# Altium PCB PCB.PcbDoc
Units mm, origin at the board's own origin, x right, y up, seen from the top; angles counter-clockwise.
Board outline 48.26 x 53.21 mm, 4 copper layers (Top Layer, GND, PWR, Bottom Layer), stack 1.586 mm thick; 30 components, 51 nets, 200 pads, 89 vias.
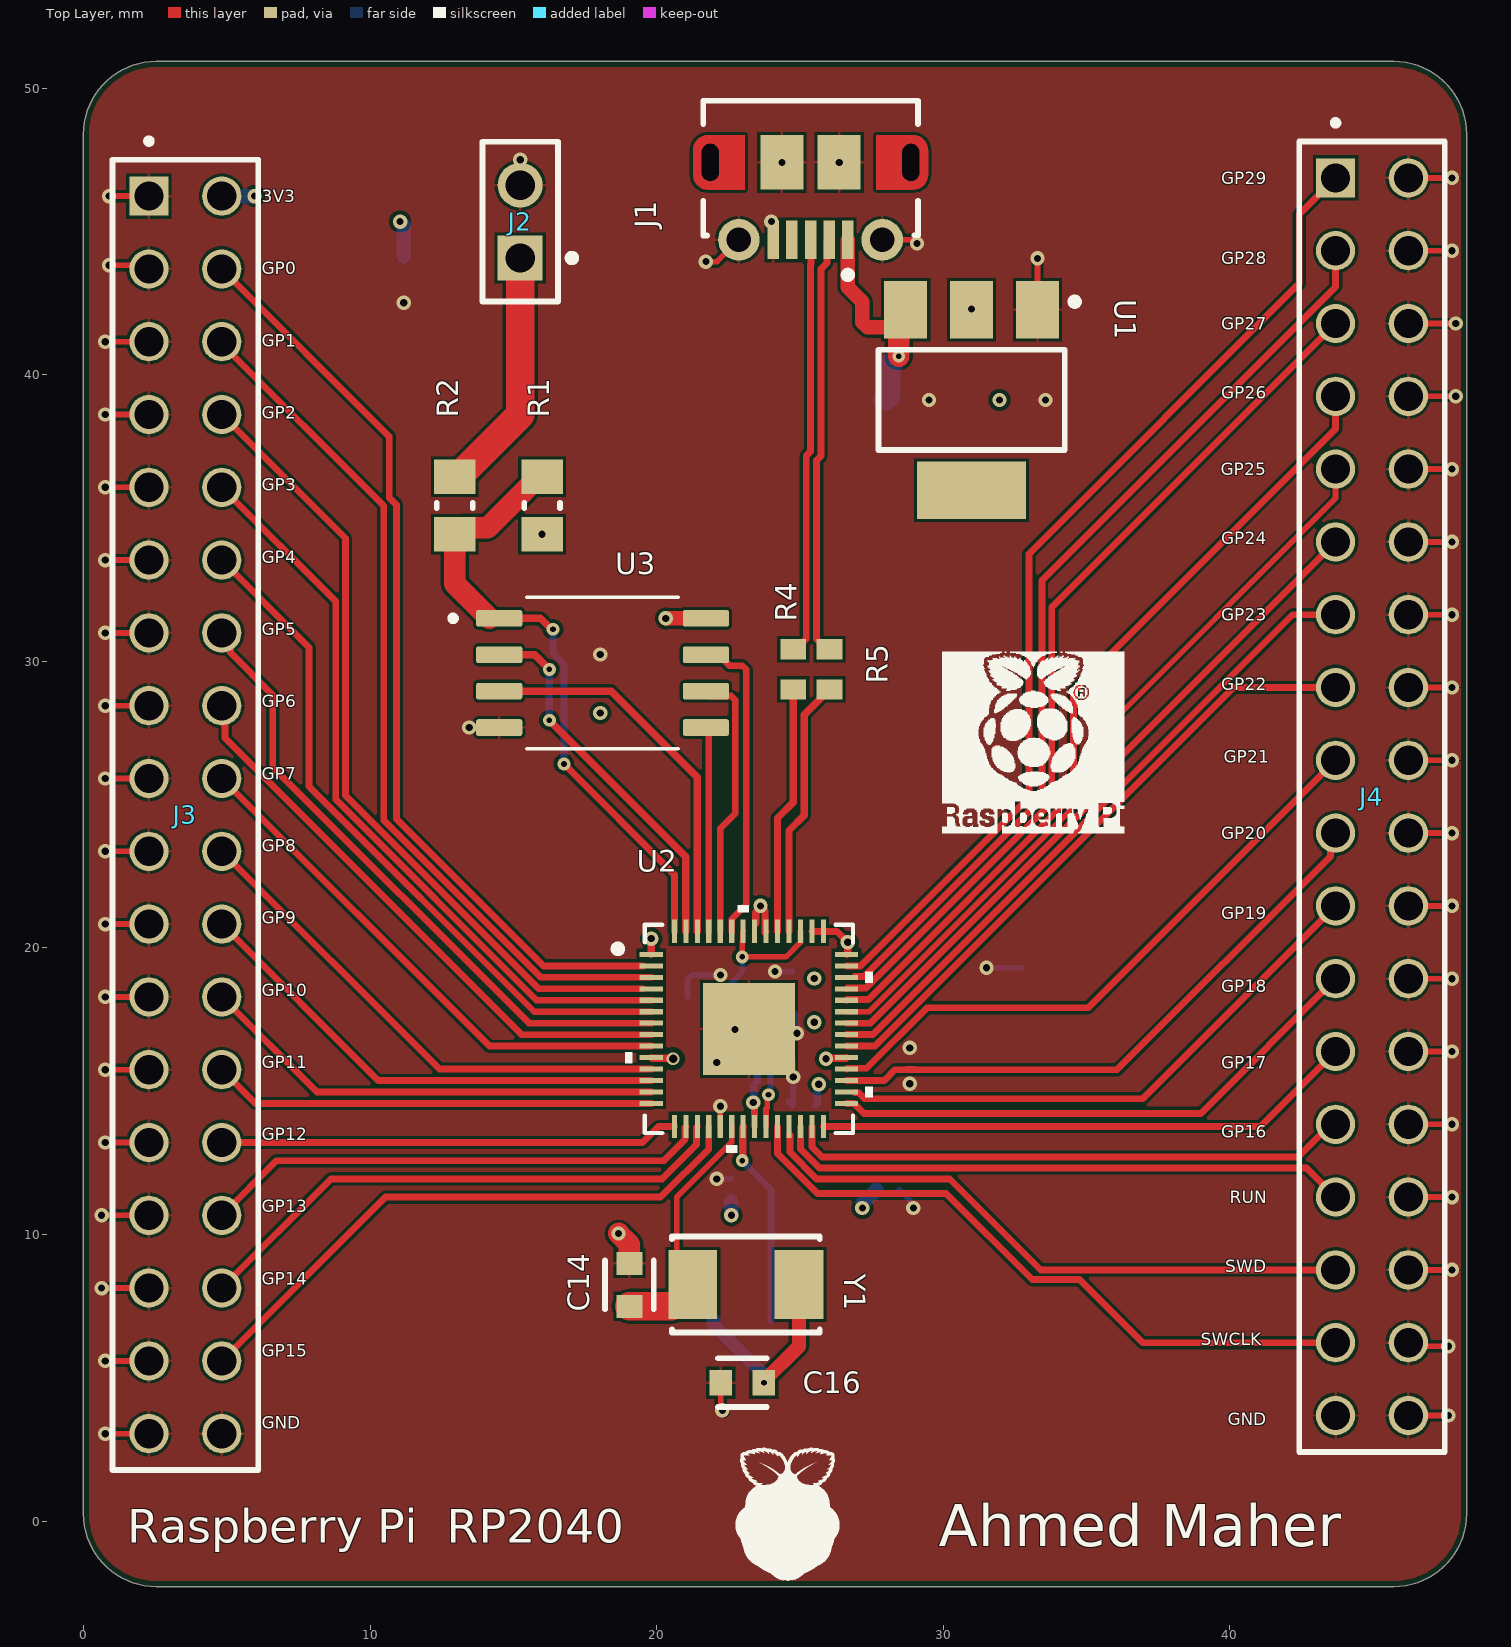
[diagram p0: Top Layer view]
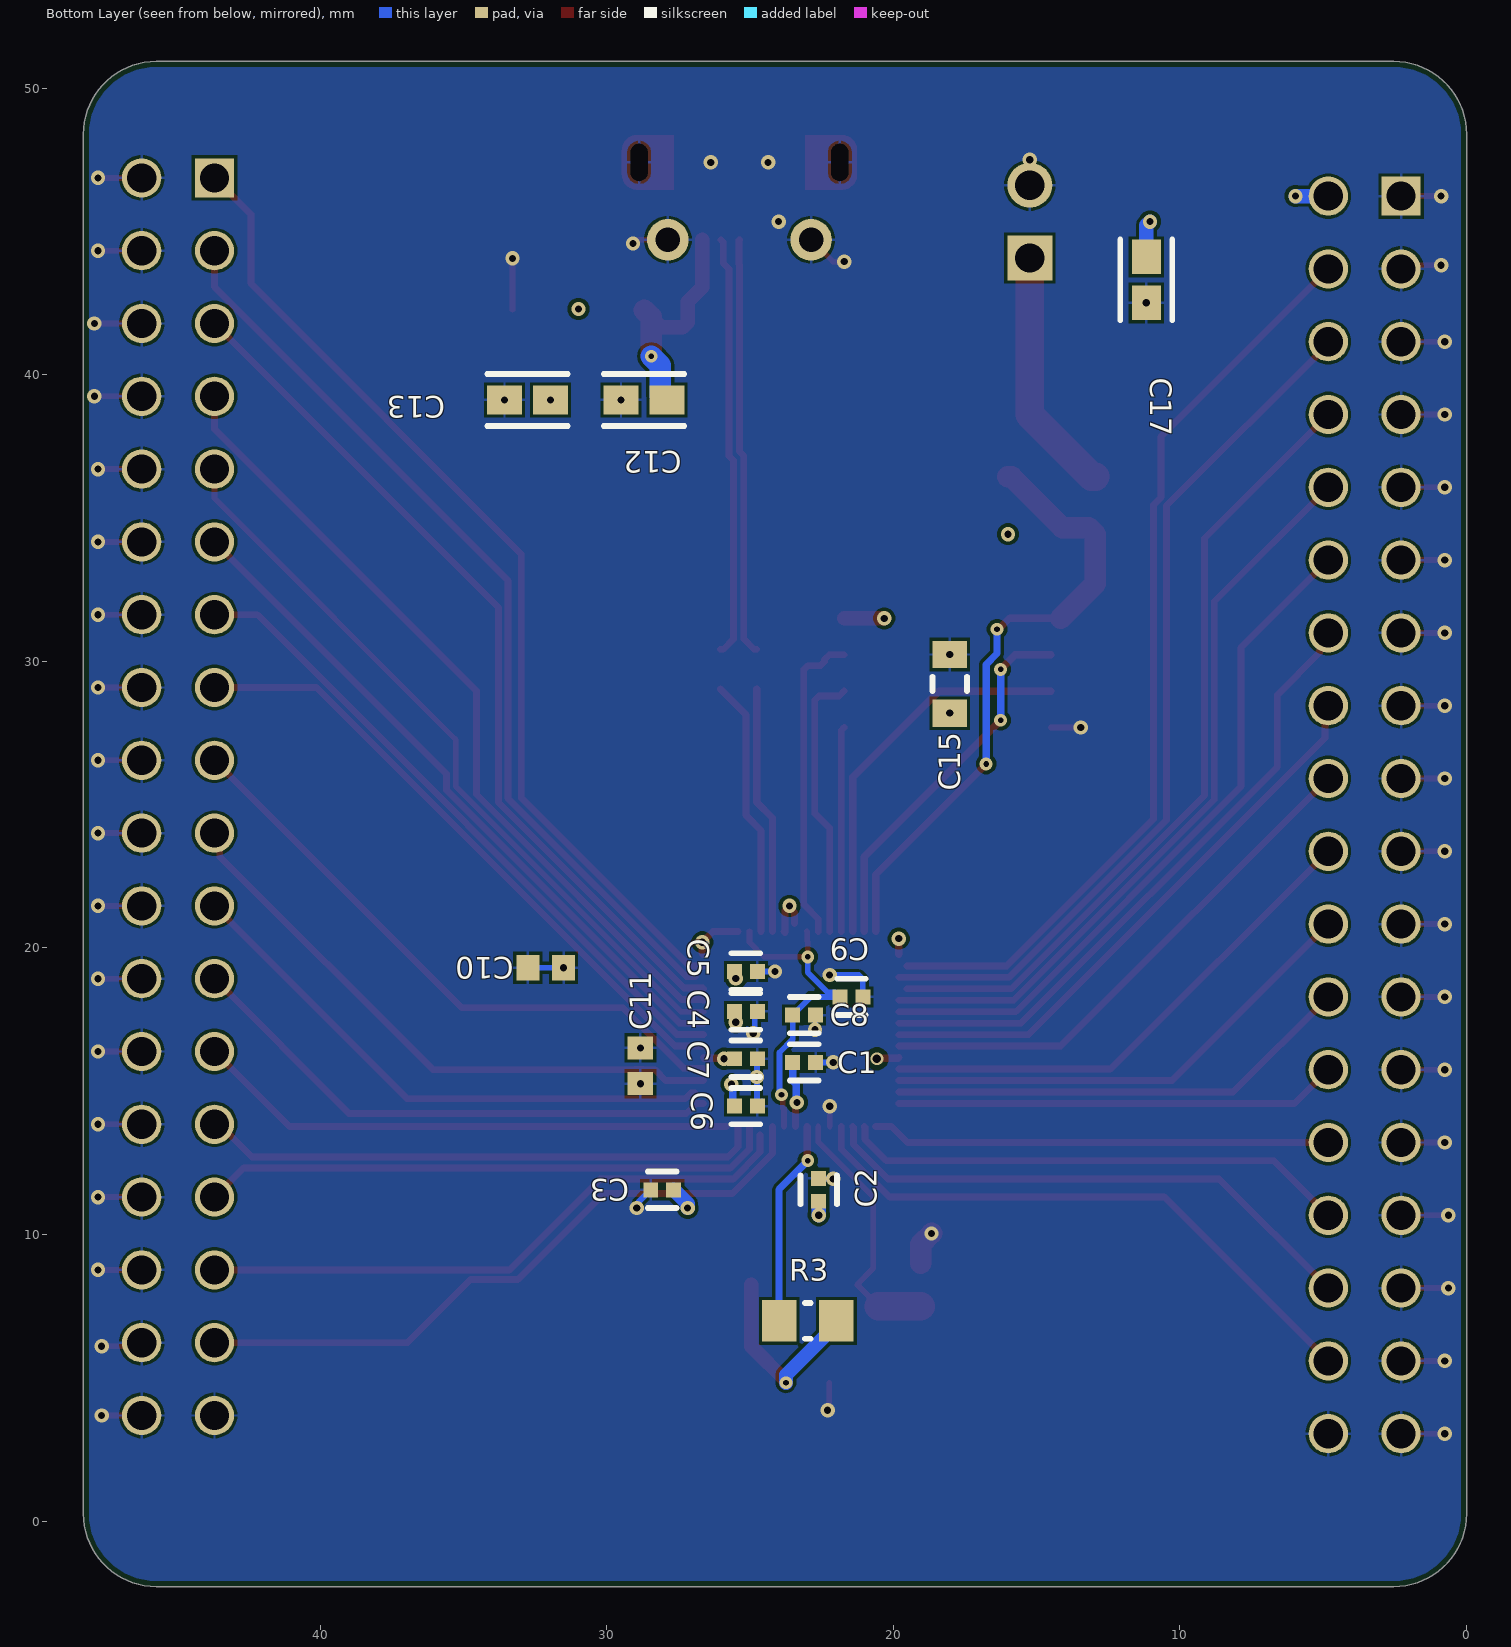
[diagram p1: Bottom Layer view, seen from below]
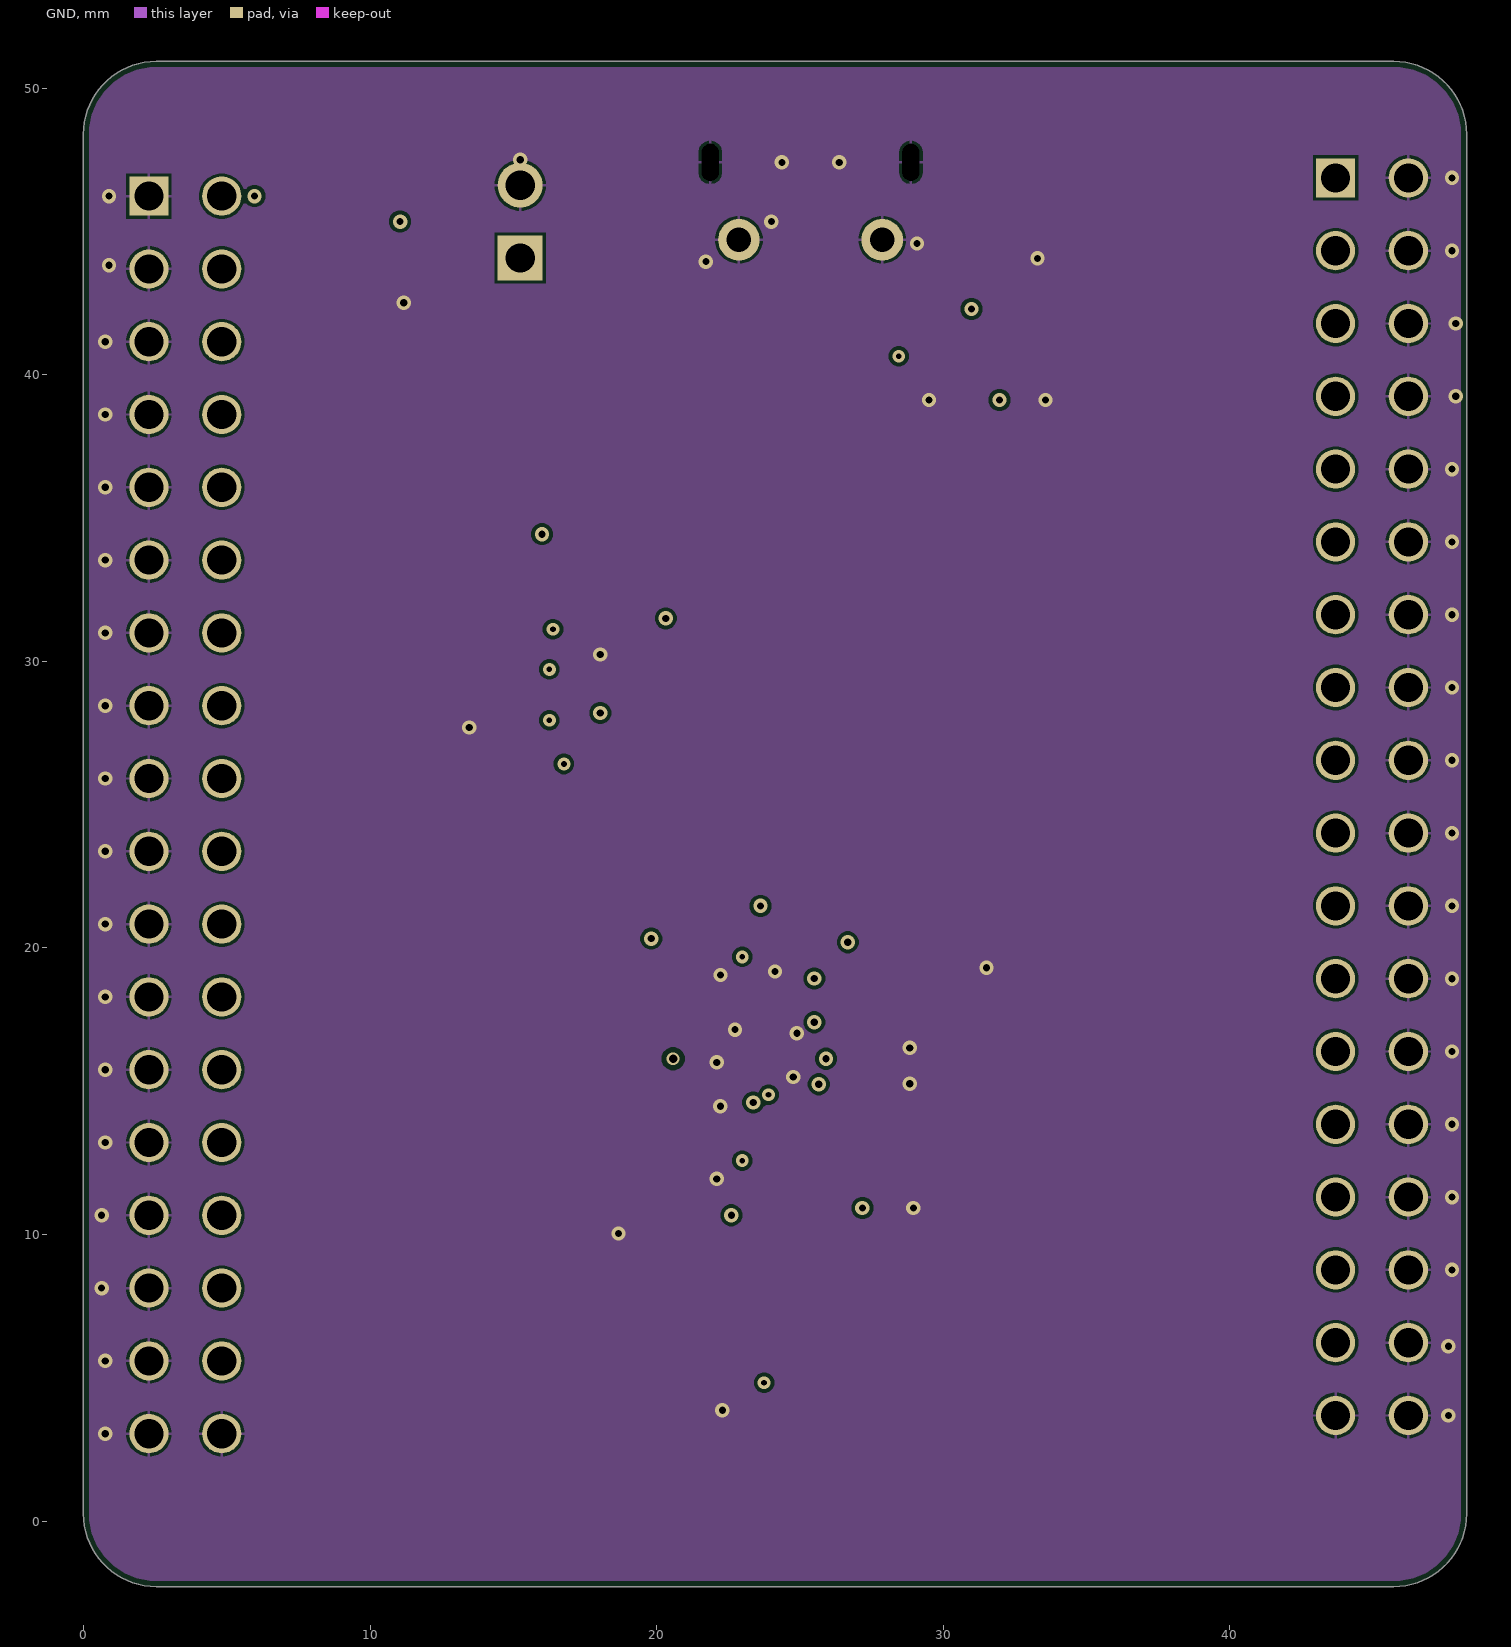
[diagram p2: GND]
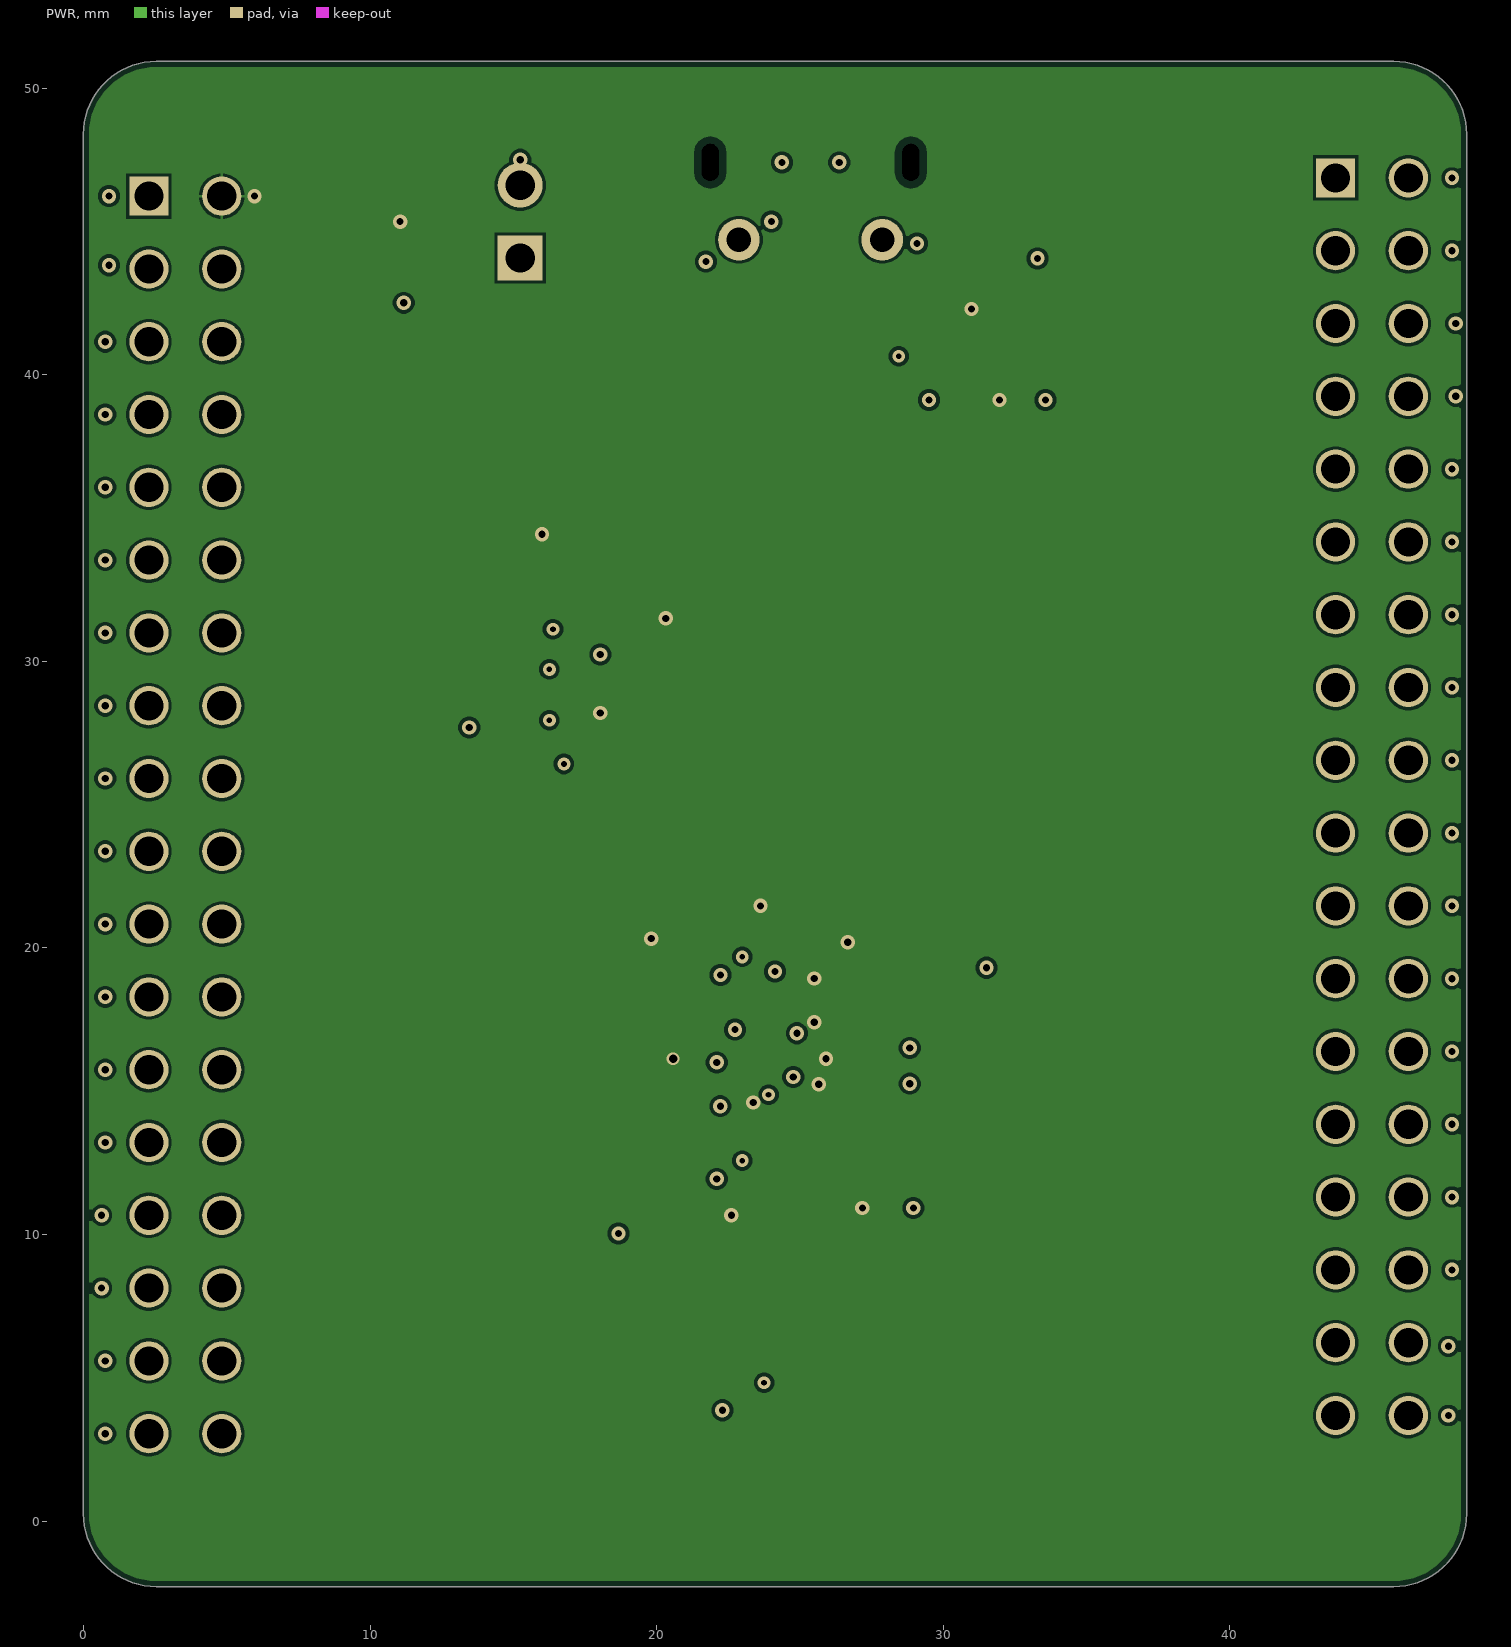
[diagram p3: PWR]
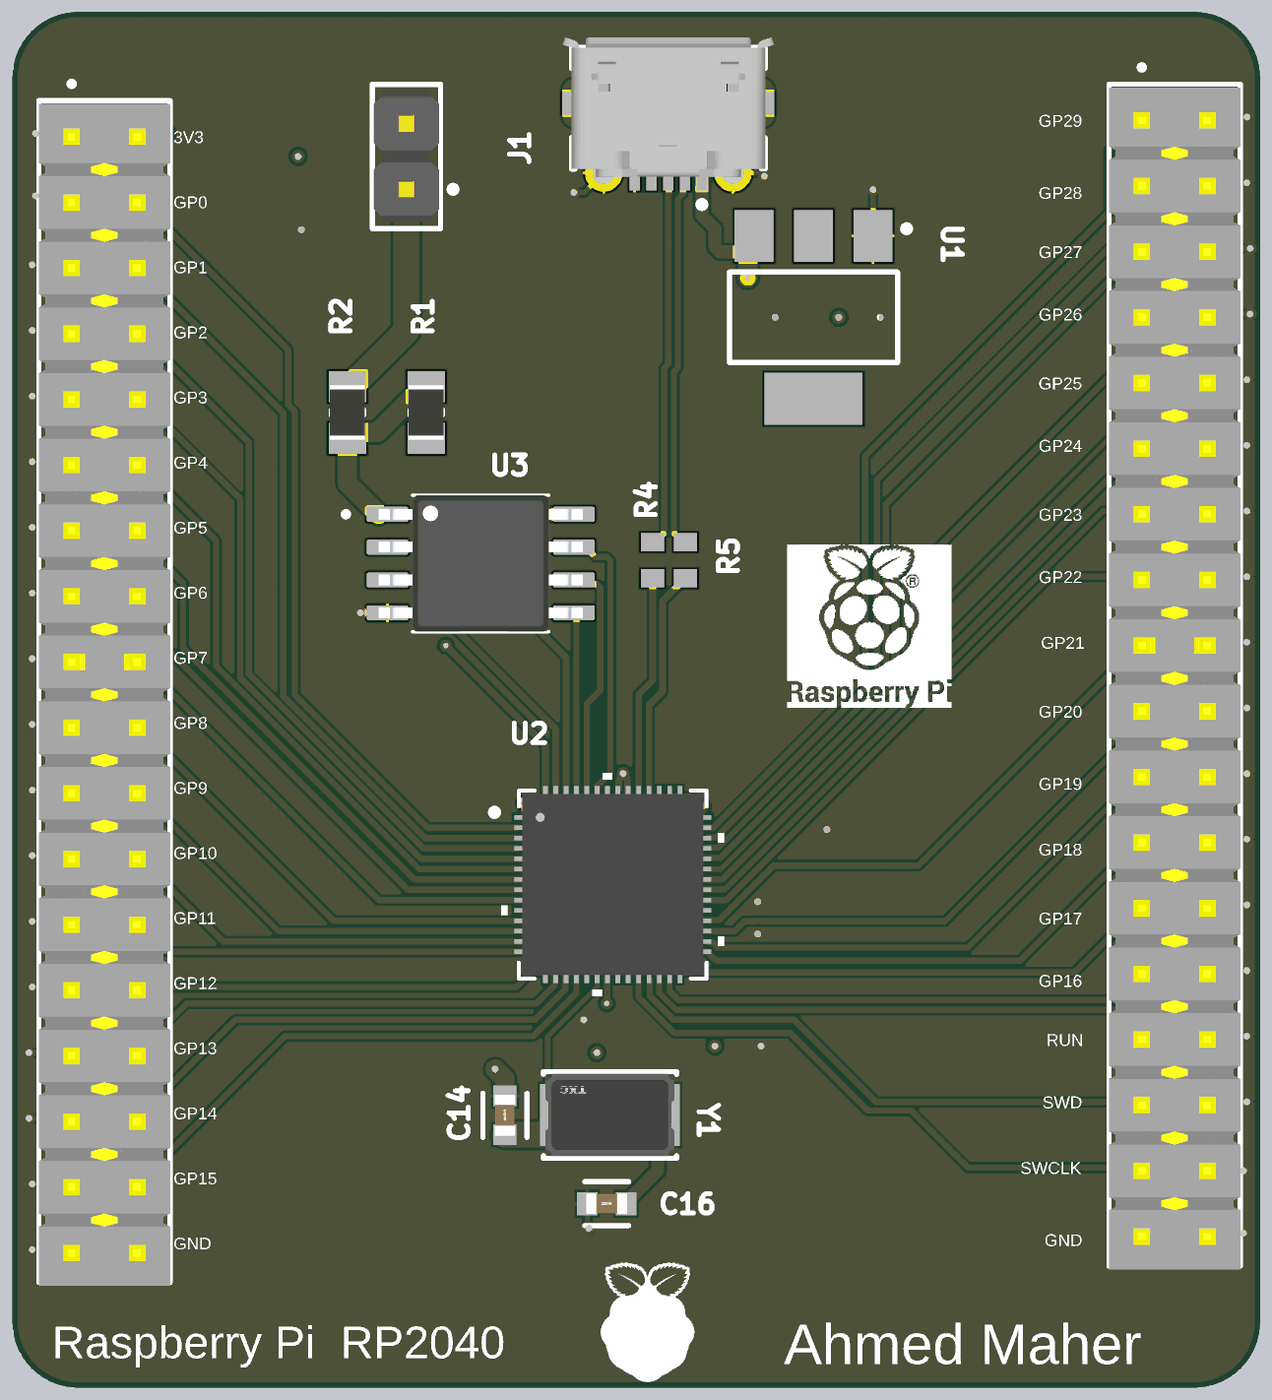
[diagram p4: 3D render of the assembled board from above, using the file's embedded part models]
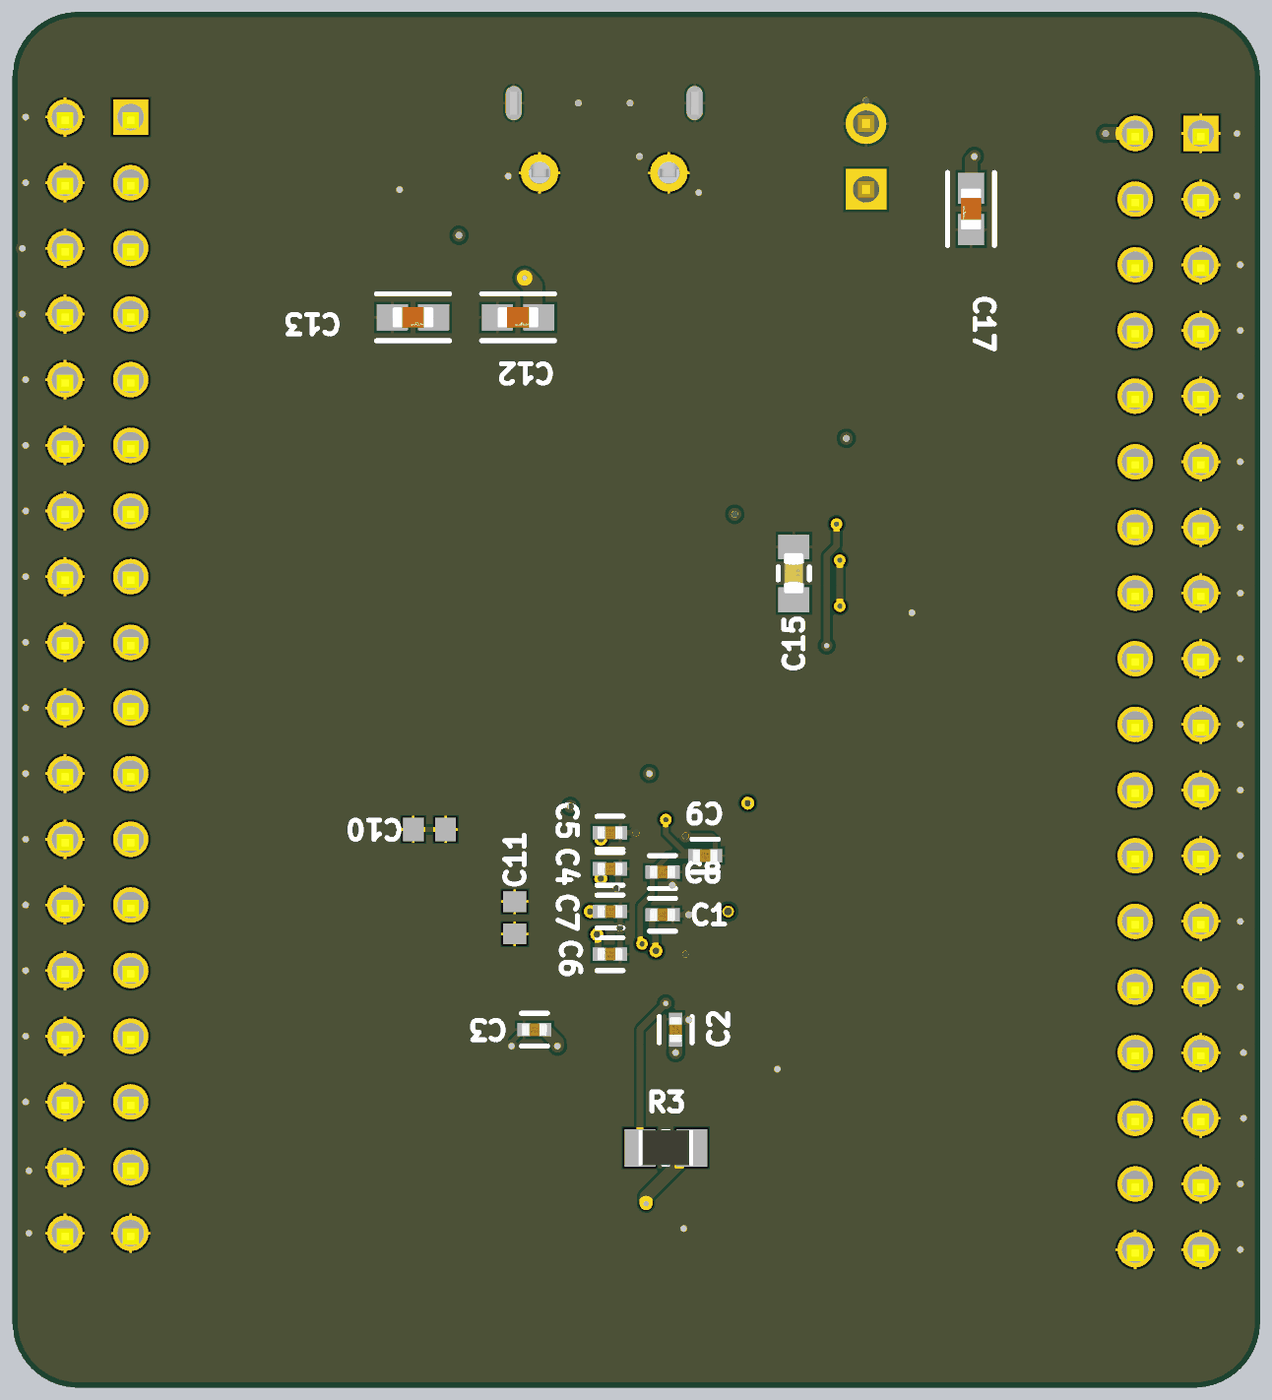
[diagram p5: 3D render of the assembled board from below, using the file's embedded part models]

## Layer stack, top to bottom
Top Solder: solder mask 0.0102, Solder Resist, Dk 3.5
Top Layer: signal copper 0.035
Dielectric 2: prepreg 0.2104, PP-022, Dk 4.5
GND: signal copper 0.0152
Dielectric 1: dielectric 1.065, FR-4, Dk 4.8
PWR: signal copper 0.0152
Dielectric 3: prepreg 0.2104, PP-022, Dk 4.5
Bottom Layer: signal copper 0.035
Bottom Solder: solder mask 0.0102, Solder Resist, Dk 3.5

## Board outline
45.72,50.927 cw(c45.72,48.387) 48.26,48.387 48.26,0.254 cw(c45.72,0.254) 45.72,-2.286 2.54,-2.286 cw(c2.54,0.254) 0,0.254 0,48.387 cw(c2.54,48.387) 2.54,50.927

## Design rules (kind name [scope] priority, off if disabled: settings)
BoardOutlineClearance [All] p1: gap=0.2 ignorepadtopadclearanceinfootprint=FALSE
Clearance [All] p1: gap=0.102 ignorepadtopadclearanceinfootprint=FALSE except(0.127: Arc-Via Track-Via SMDPad-Via THPad-Via Via-Via Via-Fill Via-Poly Via-Region Via-Text; 0.25: Arc-Hole Track-Hole SMDPad-Hole THPad-Hole Via-Hole Fill-Hole Poly-Hole Region-Hole Text-Hole)
ComponentClearance [All] p1: gap=0.102 collisioncheckmode=3 verticalgap=0.102 showdistances=TRUE
DiffPairsRouting [InDifferentialPairClass('All Differential Pairs')] p1: maxlimit=0.127 minlimit=0.102 mostfreqgap=0.127 toplayer_mingap=0.127 toplayer_minwidth=0.237 toplayer_maxwidth=0.237 toplayer_prefwidth=0.237 bottomlayer_mingap=0.127 bottomlayer_minwidth=0.237 bottomlayer_maxwidth=0.237 bottomlayer_prefwidth=0.237 impedanceprofiledriven=TRUE impedanceprofileid={D972170D-0C65-4B54-BD39-ADB1C1232674} impedanceprofilevalue=90.000000 maxuncoupledlength=12.7
Height [All] p1: minheight=0 maxheight=1816.048 prefheight=12.7
HoleSize [All] p1: absolutevalues=TRUE maxlimit=6.3 minlimit=0.2 maxpercent=80.000 minpercent=20.000
HoleToHoleClearance [All] p1: gap=0.25 allowstackedmicrovias=FALSE
MinimumAnnularRing [All] p1: minimumring=0.076
MinimumSolderMaskSliver [All] p1: minsoldermaskwidth=0
PlaneClearance [All] p1: clearance=0.102
PlaneConnect PlaneConnectPowerPads [InPadClass('PowerPads')] p1: planeconnectstyle=Direct reliefexpansion=0.508 reliefentries=4 reliefconductorwidth=0.254 reliefairgap=0.254
PlaneConnect [All] p2: pad.planeconnectstyle=Relief pad.reliefexpansion=0.3 pad.reliefentries=4 pad.reliefconductorwidth=0.102 pad.reliefairgap=0.102 via.planeconnectstyle=Direct via.reliefexpansion=0.3 via.reliefentries=4 via.reliefconductorwidth=0.127 via.reliefairgap=0.127
PolygonConnect PolygonConnectPowerPads [All vs (InPadClass('PowerPads'))] p1: connectstyle=Direct reliefconductorwidth=0.254 reliefentries=4 polygonreliefangle="90 Angle" airgapwidth=0.254
PolygonConnect [All] p2: thpad.connectstyle=Relief thpad.reliefconductorwidth=0.102 thpad.reliefentries=4 thpad.polygonreliefangle="90 Angle" thpad.airgapwidth=0.102 smdpad.connectstyle=Relief smdpad.reliefconductorwidth=0.102 smdpad.reliefentries=4 smdpad.polygonreliefangle="90 Angle" smdpad.airgapwidth=0.102 via.connectstyle=Direct via.reliefconductorwidth=0.127 via.reliefentries=4 via.polygonreliefangle="90 Angle" via.airgapwidth=0.127
RoutingVias [All] p1: holewidth=0.2 width=0.45 viastyle="Through Hole" minholewidth=0.2 minwidth=0.45 maxholewidth=6.3 maxwidth=6.55
SilkToSilkClearance [All] p1: silktosilkclearance=0
SilkToSolderMaskClearance [IsPad] p1: minsilkscreentomaskgap=0.102 clearancetoexposedcopper=TRUE
SolderMaskExpansion [All] p1: expansion=0.075 istentingtop=FALSE
Width [All] p1: maxlimit=1816.048 minlimit=0.102 preferedwidth=0.102
20 further rules are at their usual default settings.

## Classes and differential pairs
differential pair class USB_90R: USB_D
differential pair USB_D: +USB_D_P -USB_D_N

## Components (designator, comment, footprint, x,y, rotation, side; value= is the part's Value field where it differs from the comment)
C1 "C0402C104K8PACTU" FP-C0402-BB-MFG 23.114,16.002 r180 bottom value="0.10 μF"
C2 "C0402C104K8PACTU" FP-C0402-BB-MFG 22.606,11.557 r90 bottom value="0.10 μF"
C3 "C0402C104K8PACTU" FP-C0402-BB-MFG 28.067,11.557 r0 bottom value="0.10 μF"
C4 "C0402C104K8PACTU" FP-C0402-BB-MFG 25.146,17.78 r180 bottom value="0.10 μF"
C5 "C0402C104K8PACTU" FP-C0402-BB-MFG 25.146,19.177 r180 bottom value="0.10 μF"
C6 "C0402C104K8PACTU" FP-C0402-BB-MFG 25.146,14.478 r180 bottom value="0.10 μF"
C7 "C0402C104K8PACTU" FP-C0402-BB-MFG 25.146,16.129 r180 bottom value="0.10 μF"
C8 "C0402C104K8PACTU" FP-C0402-BB-MFG 23.114,17.653 r180 bottom value="0.10 μF"
C9 "C0402C104K8PACTU" FP-C0402-BB-MFG 21.463,18.288 r180 bottom value="0.10 μF"
C10 "1uF" CAPC1608X87X35LL15T15 32.131,19.304 r0 bottom
C11 "1uF" CAPC1608X87X35LL15T15 28.829,15.885 r90 bottom
C12 "10uF" FP-GRM188-0_1-e0_2_0_55-IPC_A 28.702,39.116 r180 bottom
C13 "10uF" FP-GRM188-0_1-e0_2_0_55-IPC_A 32.766,39.116 r180 bottom
C14 "12pF" FP-CC0603-0_9-MFG 19.05,8.243 r90 top
C15 "100nF" FP-CGA3E-0_3-0_1-IPC_A 18.034,29.21 r270 bottom
C16 "12pF" FP-CC0603-0_9-MFG 22.987,4.826 r180 top
C17 "GRM188R60J106ME47D" FP-GRM188-0_1-e0_2_0_55-IPC_A 11.176,43.307 r270 bottom
J1 "105017-0001" USB-MICRO-B_V 25.37,46.054 r180 top
J2 "M20-9990245" FP-M20-9990245-MFG 15.24,45.339 r90 top
J3 "TSW-118-07-G-D-LL" SAMTEC_TSW-118-07-G-D-LL 2.286,46.228 r270 top
J4 "TSW-118-07-G-D-LL" SAMTEC_TSW-118-07-G-D-LL 43.688,46.863 r270 top
R1 "DNF" RESC2013X60X35ML10T20 16.002,35.433 r270 top
R2 "1K" RESC2013X60X35ML10T20 12.954,35.433 r270 top
R3 "1K" RESC2013X60X35ML10T20 22.987,6.985 r0 bottom
R4 "RC0603FR-07274RL" RESC1608X55X25NL10T15 24.765,29.718 r90 top
R5 "RC0603FR-07274RL" RESC1608X55X25NL10T15 26.035,29.718 r90 top
U1 "NCP1117ST33T3G" ONSC-SOT-223-4-318H-01_A_V 30.988,39.116 r270 top
U2 "RP2040" IC57_RP2040 23.219,17.17 r0 top
U3 "W25Q128JVSIM_TR" SOIC127P790X216-8N 18.112,29.591 r0 top
Y1 "12MHZ" FP-7A-MFG 23.114,8.255 r180 top

## Footprints (in the part's own frame and the unit in brackets; to place one, negate y for a bottom-side part, rotate by r counter-clockwise, add the part's x,y. Pads: shape width x height; smd on the part's side, far side on the other; paste and mask are expansions set on the pad)
CAPC1608X87X35LL15T15 [mm] "Chip Capacitor, 2-Leads, Body 1.60x0.80mm, IPC High Density"
  rect 0.8x0.9 smd: 1(-0.625,0) 2(0.625,0)
  body extent -0.87,-0.48 0.87,0.48, height 0.87
FP-7A-MFG [mm]
  rect 1.7x2.4 smd paste+0 mask+0: 1(-1.85,0) 2(1.85,0)
  silkscreen extent -2.58,-1.68 2.58,1.68, body extent -2.8,-1.78 2.8,1.78, height 0.25
FP-C0402-BB-MFG [mm]
  rect 0.52x0.52 smd paste+0 mask+0: 1(-0.4,0) 2(0.4,0)
  silkscreen extent -0.5,-0.64 0.5,0.64, body extent -0.5,-0.25 0.5,0.25, height 0.55
FP-CC0603-0_9-MFG [mm]
  rect 0.8x0.9 smd paste+0 mask+0: 1(-0.75,0) 2(0.75,0)
  silkscreen extent -0.85,-0.85 0.85,0.85, body extent -1.43,-0.82 1.43,0.82, height 0.25
FP-CGA3E-0_3-0_1-IPC_A [mm]
  rect 0.956x1.206 smd paste+0 mask+0: 1(-1.025,0) 2(1.025,0)
  silkscreen extent -0.25,-0.6 0.25,0.6, body extent -0.8,-0.4 0.8,0.4, height 1.1
FP-GRM188-0_1-e0_2_0_55-IPC_A [mm]
  rect 1.208x1.012 smd paste+0 mask+0: 1(-0.802,0) 2(0.802,0)
  silkscreen extent -1.41,-0.91 1.41,0.91, body extent -0.8,-0.4 0.8,0.4, height 0.9
FP-M20-9990245-MFG [mm]
  rect 1.57x1.57 hole 1.02 paste-2539.97 mask+0: 1(-1.27,0)
  round 1.57 hole 1.02 paste-2539.97 mask+0: 2(1.27,0)
  silkscreen extent -2.79,-1.92 2.79,1.32, body extent -2.89,-1.42 2.89,1.42, height 0.25
IC57_RP2040 [mil]
  rect 32x7 smd paste+0 mask+0: 1(-134,102.36) 2(-134,86.61) 3(-134,70.87) 4(-134,55.12) 5(-134,39.37) 6(-134,23.62) 7(-134,7.87) 8(-134,-7.87) 9(-134,-23.62) 10(-134,-39.37) 11(-134,-55.12) 12(-134,-70.87) 13(-134,-86.61) 14(-134,-102.36) 29(134,-102.36) 30(134,-86.61) 31(134,-70.87) 32(134,-55.12) 33(134,-39.37) 34(134,-23.62) 35(134,-7.87) 36(134,7.87) 37(134,23.62) 38(134,39.37) 39(134,55.12) 40(134,70.87) 41(134,86.61) 42(134,102.36)
  rect 7x32 smd paste+0 mask+0: 15(-102.36,-134) 16(-86.61,-134) 17(-70.87,-134) 18(-55.12,-134) 19(-39.37,-134) 20(-23.62,-134) 21(-7.87,-134) 22(7.87,-134) 23(23.62,-134) 24(39.37,-134) 25(55.12,-134) 26(70.87,-134) 27(86.61,-134) 28(102.36,-134) 43(102.36,134) 44(86.61,134) 45(70.87,134) 46(55.12,134) 47(39.37,134) 48(23.62,134) 49(7.87,134) 50(-7.87,134) 51(-23.62,134) 52(-39.37,134) 53(-55.12,134) 54(-70.87,134) 55(-86.61,134) 56(-102.36,134)
  rect 126x126 smd paste-63 mask+0: 57(0,0)
  silkscreen extent -185,-170 170,170, body extent -138,-138 138,138, height 35
ONSC-SOT-223-4-318H-01_A_V [mm] "SOT223, 4-Leads, Body 6.5x3.5mm, Pitch 2.3mm"
  rect 2x1.5 smd: 1(-3.15,2.3) 2(-3.15,0) 3(-3.15,-2.3)
  rect 2x3.8 smd: 4(3.15,0)
  silkscreen extent -3.55,-3.25 1.75,3.73, body extent -1.75,-3.25 1.75,3.25, height 1.8
RESC1608X55X25NL10T15 [mm] "Chip Resistor, 2-Leads, Body 1.60x0.80mm, IPC Medium Density"
  rect 0.7x0.9 smd: 1(-0.7,0) 2(0.7,0)
  body extent -0.85,-0.45 0.85,0.45, height 0.55
RESC2013X60X35ML10T20 [mm] "Chip Resistor, 2-Leads, Body 2.1x1.35mm, IPC Low Density"
  rect 1.2x1.45 smd: 1(-1,0) 2(1,0)
  silkscreen extent -0.1,-0.63 0.1,0.63, body extent -1.05,-0.68 1.05,0.67, height 0.6
SAMTEC_TSW-118-07-G-D-LL [mm]
  rect 1.37x1.37 hole 1.02: 01(0,0)
  round 1.37 hole 1.02: 02(0,2.54) 03(2.54,0) 04(2.54,2.54) 05(5.08,0) 06(5.08,2.54) 07(7.62,0) 08(7.62,2.54) 09(10.16,0) 10(10.16,2.54) 11(12.7,0) 12(12.7,2.54) 13(15.24,0) 14(15.24,2.54) 15(17.78,0) 16(17.78,2.54) 17(20.32,0) 18(20.32,2.54) 19(22.86,0) 20(22.86,2.54) 21(25.4,0) 22(25.4,2.54) 23(27.94,0) 24(27.94,2.54) 25(30.48,0) 26(30.48,2.54) 27(33.02,0) 28(33.02,2.54) 29(35.56,0) 30(35.56,2.54) 31(38.1,0) 32(38.1,2.54) 33(40.64,0) 34(40.64,2.54) 35(43.18,0) 36(43.18,2.54)
  silkscreen extent -2.02,-1.27 44.45,3.81, body extent -1.14,-1.27 44.58,3.81, height 5.09
SOIC127P790X216-8N [mm]
  rrect25% 1.61x0.58 smd: 1(-3.605,1.905) 2(-3.605,0.635) 3(-3.605,-0.635) 4(-3.605,-1.905) 5(3.605,-1.905) 6(3.605,-0.635) 7(3.605,0.635) 8(3.605,1.905)
  silkscreen extent -5.31,-2.64 2.64,2.64, body extent -3.95,-2.64 3.95,2.64, height 2.16
USB-MICRO-B_V [mm] "USB, MICRO B, Body 7.491x4.695 mm, Pitch 0.65 mm"
  rect 0.4x1.35 smd: 1(-1.3,1.35) 2(-0.65,1.35) 3(0,1.35) 4(0.65,1.35) 5(1.3,1.35)
  round 1.45 hole 0.85: 6(-2.5,1.35) 7(2.5,1.35)
  rrect50% 0x0 hole 0.6 slot 1.3 at 90 deg: 8(-3.5,-1.35) 11(3.5,-1.35)
  rect 1.5x1.9 smd: 9(-1,-1.35) 10(1,-1.35)
  Top Layer circle w0.5: c-3.6,-1.8 r0.25
  Top Layer circle w0.5: c-3.6,-0.9 r0.25
  Top Layer circle w0.5: c3.6,-1.8 r0.25
  Top Layer circle w0.5: c3.6,-0.9 r0.25
  Top Layer region: -3.6,-1.8 -3.6,-0.9 -4.1,-0.9 -4.1,-1.8
  Top Layer region: 3.6,-0.9 3.6,-1.8 4.1,-1.8 4.1,-0.9
  Top Layer region: 2.3,-0.4 2.3,-2.3 3.6,-2.3 3.6,-0.4
  Top Layer region: -2.3,-2.3 -2.3,-0.4 -3.6,-0.4 -3.6,-2.3
  silkscreen extent -3.75,-3.5 3.75,2.7, body extent -4.1,-3.9 4.1,1.5, height 2.67

## Part data
C1 C2 C3 C4 C5 C6 C7 C8 C9: library part CMP-2008-02046-2, "CAP CER 0.1UF 10V X5R 0402", Capacitance="0.10 μF", Manufacturer=Kemet, Package=C0402-BB, Temperature="-55°C to +125°C", Temperature Characteristic=X5R, Temperature Coefficient=15%, Temperature Range High=+125°C, Temperature Range Low=-55°C, Tolerance=0.1, Voltage Rating="10 V", Automotive=No, Category=Cap, ComponentLink2Description=Datasheet, ComponentLink2URL=https://content.kemet.com/datasheets/KEM_C1002_X7R_SMD.pdf, Device Class L1="Passive Components", Device Class L2=Capacitors, Device Class L3="Ceramic Capacitors", Digikey Description="CAP CER 0.1UF 10V X5R 0402", Height=0.55mm, Ipc Land Pattern Name=CAPC10050X50, Lead Free=Yes, Manufacturer Part Number=C0402C104K8PACTU, Material=Ceramic, Mouser Description="Capacitor 100 nF 10 VDC 0402", Octopart=https://octopart.com/c0402c104k8pactu-kemet-140039, RoHS=TRUE
C10 C11: library part CMP-2006-03713-1, Manufacturer=Kemet, Part Number=C0603C105K3RACTU
C12 C13: library part CMP-2006-02792-2, "Chip Multilayer Ceramic Capacitors for General Purpose, 0603, 10uF, X5R, 15%, 20%, 6.3V", Case Code (Imperial)=0603, Case Code (Metric)=1608, Dielectric=X5R, Max Operating Temperature=85°C, Min Operating Temperature=-55°C, Package Quantity=4000, Tolerance=20%, Voltage=6.3V, Capacitance=10uF, Case/Package=0603, Depth=0.8mm, Height=0.8mm, Lead Free="Lead Free", Length=1.6mm, Material=Ceramic, Mount="Surface Mount", Packaging="Tape and Reel", Radiation Hardening=No, REACH SVHC="No SVHC", Termination=SMD/SMT, Thickness=0.035inch, Voltage Rating=6.3V, Voltage Rating (DC)=6.3V, Width=0.031inch
C14 C16: library part CMP-03422-001493-1, "CAP CER 15PF 50V C0G/NPO 0603", Capacitance=15pF, Case Code (Imperial)=0603, Case Code (Metric)=1608, Dielectric=C0G, Dielectric Material=Ceramic, Insulation Resistance=100GR, Max Operating Temperature=125°C, Min Operating Temperature=-55°C, Package Quantity=1, Tolerance=5%, Voltage Rating=50V, Case/Package=0603, Depth=0.8mm, Height=0.8mm, Lead Free="Lead Free", Length=1.6mm, Mount="Surface Mount", Number of Pins=2, Packaging="Tape and Reel", Radiation Hardening=No, REACH SVHC="No SVHC", RoHS Compliant=Yes, Series=CC, Termination=SMD/SMT, Thickness=0.035inch, Width=0.031inch
C15: library part CMP-2000-07546-2, "Cap Ceramic 100nF 50V X7R 10% Pad SMD 0603 +125°C Automotive T/R", Case Code (Imperial)=0603, Case Code (Metric)=1608, Dielectric=X7R, Max Operating Temperature=125°C, Min Operating Temperature=-55°C, Package Quantity=1, Ratings=AEC-Q200, Tolerance=10%, Voltage=50V, Capacitance=100nF, Case/Package=0603, Composition=Ceramic, Depth=0.8mm, Height=0.8mm, Lead Free="Lead Free", Length=1.6mm, Mount="Surface Mount", Packaging="Tape and Reel", Radiation Hardening=No, REACH SVHC="No SVHC", Termination=SMD/SMT, Thickness=0.035inch, Voltage Rating=50V, Voltage Rating (DC)=50V, Weight=7.1E-05oz, Width=0.8mm
C17: library part CMP-2006-02792-2, "Chip Multilayer Ceramic Capacitors for General Purpose, 0603, 10uF, X5R, 15%, 20%, 6.3V", Capacitance=10uF, Case Code (Imperial)=0603, Case Code (Metric)=1608, Dielectric=X5R, Max Operating Temperature=85°C, Min Operating Temperature=-55°C, Package Quantity=4000, Tolerance=20%, Voltage=6.3V, Case/Package=0603, Depth=0.8mm, Height=0.8mm, Lead Free="Lead Free", Length=1.6mm, Material=Ceramic, Mount="Surface Mount", Packaging="Tape and Reel", Radiation Hardening=No, REACH SVHC="No SVHC", Termination=SMD/SMT, Thickness=0.035inch, Voltage Rating=6.3V, Voltage Rating (DC)=6.3V, Width=0.031inch
J1: library part CMP-2000-05827-1, "Micro-USB B Receptacle, Right Angle, Bottom Mount, Surface Mount, with Solder Tabs, -30 to 85 degC, 5-Pin USB, RoHS, Tape and Reel", Manufacturer=Molex, Package Description="5-Leads USB, Micro B, Body 7.5 x 5 mm, Pitch 0.65 mm", Package Reference=MICRO-B, Package Version="Rev. F, 12/2012", Standard Package=1, Voltage - Max=30V, 3D Model=105017-0001.stp, Catalog Drawings=1050170001, Category=Connectors,Interconnects, Circuits=5, Connector Type=USB-microB, Datasheet URL=http://www.molex.com/elqNow/elqRedir.htm?ref=http://www.molex.com/webdocs/datasheets/pdf/en-us/1050170001_IO_CONNECTORS.pdf, Datasheet Version=03/2016, Family=USB,DVI,HDMIConnectors, Featured Product=Micro-USBConnectorsUSBConnectors, Features=Shielded,SolderRetention, Gender=Receptacle, Ingress Protection=-, Manufacturer URL=http://www.molex.com/, Mating Products=WM17145-ND-CABLEMICROUSBBTOSTDA1.0MWM17147-ND-CABLEMICROUSBBTOSTDA2.0MWM17146-ND-CABLEMICROUSBBTOSTDA1.5M, Mounting Technology=SurfaceMount, Mounting Type=BoardCutout,SurfaceMount,RightAngle, Number of Contacts=5, Online Catalog=Molex-MicroUSB, Other Names=WM1399DKR, Package URL=http://www.molex.com/pdm_docs/sd/1050170001_sd.pdf, Packaging=Digi-Reel®, PCN Assembly/Origin=ResinSupplier21/Oct/2015, RoHS Information=1050170001CertofCompliance, Series=-, Specifications=-
J2: library part CMP-15831-000105-1, "CONN HEADER VERT 2POS 2.54MM", Case/Package=SIL, Color=Black, Contact Resistance=25mR, Current=3A, Flammability Rating="UL94 V-0", Insulation Resistance=10GR, Max Operating Temperature=105°C, Min Operating Temperature=-40°C, Package Quantity=1000, Voltage=50V, Voltage Rating (AC)=750V, Connector Type="Male Pin", Contact Finish - Mating=GOLD, Contact Material=Brass, Contact Mating Length=0.24inch, Contact Plating=Gold, Contact Shape=Square, Contact Type="Male Pin", Current Rating=3A, Depth=2.54mm, Fastening Type=Pull, Gender=Male, Height=0.12inch, Housing Color=Black, Housing Material=Nylon, Insulation Color=Black, Insulation Material=Nylon, Lead Pitch=2.54mm, Length=5.08mm, Mated Stacking Heights=16.54mm, Mating Cycles=300, Max Current Rating=3A, Mount="Through Hole", Number of Contacts=2, Number of Poles=2, Number of Positions=2, Number of Rows=1, Orientation=Straight, Packaging=Bulk, Pitch=2.54mm, Radiation Hardening=No, Reach SVHC Compliant=Yes, Series=M20, Termination=Solder, Weight=0.25lb, Width=0.25inch, Working Voltage=750V
J3 J4: Package=None, Availability=Unavailable, MP=TSW-118-07-G-D-LL, Price=None
R1 R2 R3: library part CMP-2100-03671-1, "Chip Resistor, 1 KOhm, +/- 1%, 125 mW, -55 to 155 degC, 0805 (2012 Metric), RoHS, Tape and Reel", Case Code (Imperial)=0805, Case Code (Metric)=2012, Manufacturer=Yageo, Max Operating Temperature=155degC, Max Power Dissipation=125mW, Min Operating Temperature=-55degC, Package Description="2-Pin Surface Mounted Device, Body 2 x 1.25 mm", Package Quantity=1, Resistance=1KOhm, Temperature Coefficient=100ppm/degreesC, Tolerance=1%, Voltage Rating=150V, Case/Package=0805, Composition=ThickFilm, Datasheet URL=http://www.yageo.com/NewPortal/yageodocoutput?fileName=/pdf/R-Chip/PYu-RC_Group_51_RoHS_L_5.pdf, Datasheet Version="Rev. 5, 10/2016", Depth=1.25mm, Height=0.024inch, Lead Free=LeadFree, Length=0.079inch, Manufacturer URL=http://www.yageo.com/, Military Standard=Not, Number of Pins=2, Number of Terminations=2, Package Reference=0805, Packaging=TapeandReel, Power Rating=125mW, REACH SVHC=Unknown, RoHSCompliant=true, Termination=SMD/SMT, Voltage Rating (DC)=150V, Width=0.049inch
R4 R5: library part CMP-2000-03975-1, Manufacturer=Yageo, Part Number=RC0603FR-07274RL
U1: library part CMP-1679-00010-1, "Low-Dropout Positive Fixed Voltage Regulator, 1 A, 3.3 V Output Voltage, 0 to 125 degC, 4-Pin SOT-223 (318H-01), Pb-Free, Tape and Reel", Case Code (Imperial)=0603, Case Code (Metric)=1608, Max Operating Temperature="155 degC", Min Operating Temperature="-55 degC", Package Quantity=5000, Power Rating="100 mW", Resistance="220 kohm", Tolerance=1%, Type (Resistor)="Thick Film", Voltage Rating="75 V", Case\Package=0603, ComponentLink1Description="Manufacturer URL", ComponentLink1URL=http://www.onsemi.com/, ComponentLink2Description=Datasheet, ComponentLink2URL=http://www.onsemi.com/pub_link/Collateral/NCP1117-D.PDF, DatasheetVersion="Rev. 27, 09/2014", Height="0.45 mm", Length="1.55 mm", Mount="Surface Mount", PackageDescription="4-Pin Small Outline Transistor, Body 6.5 x 3.5 mm, Pitch 2.3 mm", PackageReference=SOT-223-4-318H-01_A, Packaging="Tape and Reel", Radiation Hardening=No, REACH SVHC=Unknown, RoHSCompliant=true, Weight="7.1E-05 oz", Width="0.85 mm"
U2: "No Description Available", Manufacturer_Name="Raspberry Pi", Copyright="Copyright (C) 2025 Ultra Librarian. All rights reserved.", Manufacturer_Part_Number=RP2040, RefDes=RefDes, Type=Type
U3: "FLASH - NOR Memory IC 128Mb (16M x 8) SPI - Quad I/O, QPI, DTR 133 MHz 8-SOIC", Package="SOIC-8 Winbond Electronics", Check_prices=https://www.snapeda.com/parts/W25Q128JVSIM%20TR/Winbond/view-part/?ref=eda, MF="Winbond Electronics", MP="W25Q128JVSIM TR", SnapEDA_Link=https://www.snapeda.com/parts/W25Q128JVSIM%20TR/Winbond/view-part/?ref=snap
Y1: library part CMP-18717-000024-1, "Quartz Crystal 12MHz, 30ppm, 12pF, 80Ω", Case/Package=SMD/SMT, ESR (Equivalent Series Resistance)=80R, Frequency=12MHz, Frequency Stability=30ppm, Load Capacitance=12pF, Max Operating Temperature=85°C, Min Operating Temperature=-20°C, Package Quantity=1, Depth=3.2mm, Frequency Tolerance=30ppm, Height=0.053inch, Lead Free="Contains Lead", Length=5mm, Mount="Surface Mount", Number of Pins=2, Packaging="Tape and Reel", RoHS Compliant=Yes, Series=7A, Termination=SMD/SMT, Tolerance=30ppm, Width=0.126inch

## Via types
v1: diameter 0.5, hole 0.25, Top Layer to Bottom Layer, tented both sides, 73 vias
v2: diameter 0.45, hole 0.2, Top Layer to Bottom Layer, 7 vias
v3: diameter 0.5, hole 0.25, Top Layer to Bottom Layer, 6 vias
v4: diameter 0.45, hole 0.2, Top Layer to Bottom Layer, tented both sides, 2 vias
v5: diameter 0.45, hole 0.3, Top Layer to Bottom Layer, 1 vias

## Nets (pads, with @x,y where several pads share a name; then routed paths per layer and width w, separated by ;. In a path a pad name is that pad's centre, name@x,y a point inside that pad or via, vN(x,y) a via of type N, cw(c..) or ccw(c..) an arc to the next point about the centre after c; other vN are vias at no path point)
+1V1: C8.1 C9.1 U2.23 U2.45 U2.50 | length 11.6
  Top Layer w0.2: U2.50 23.008,20.563 23.008,20.231 22.987,20.21 v2(22.987,19.685) 24.511,19.685 25.019,20.193 U2.45 ; U2.23 23.819,14.381 23.859,14.421 23.859,14.826 v2(23.906,14.874)
  Bottom Layer w0.2: v2(22.987,19.685) 22.987,19.137 22.298,18.448 22.023,18.448 C9.1 22.884,18.288 23.199,17.973 23.199,17.968 C8.1 23.514,16.807 23.976,16.346 23.976,15.011 23.906,14.942 v2(23.906,14.874)
+3V3: C1.1 C2.1 C3.1 C4.1 C5.1 C6.1 C7.1 C13.2 C15.2 C17.1 J3.02 R1.2 U1.2 U2.1 U2.10 U2.22 U2.33 U2.42 U2.43 U2.44 U2.48 U2.49 U3.8 | length 13.9
  Top Layer w0.25: v3(19.812,20.32) 19.812,19.774 U2.1 ; U2.10 19.836,16.15 20.553,16.15 v5(20.574,16.129) ; v3(23.368,14.605) 23.419,14.554 U2.22 ; U2.49@23.455,20.855 23.455,21.228 23.622,21.395 v1(23.622,21.463) 23.783,21.302 23.783,20.538 U2.48 ; U2.44 U2.43 26.289,20.574 v1(26.67,20.193) 26.67,19.807 26.634,19.77 U2.42 ; v3(25.908,16.129) 25.929,16.15 26.602,16.15 U2.33
  Top Layer w0.5: v1(20.32,31.496) U3.8
  Bottom Layer w0.25: v3(23.368,14.605) 23.389,14.626 23.389,15.23 23.514,15.355 C1.1 ; C6.1 25.606,14.538 25.606,15.192 v3(25.654,15.24)
  Bottom Layer w0.5: J3.02 v1(5.969,46.228) ; v1(11.049,45.339) 11.176,45.212 C17.1 ; v1(22.606,10.668) C2.1 ; v1(27.178,10.922) 27.178,11.068 C3.1
  other v1: 18.034,28.194 16.002,34.433 31.964,39.116 30.988,42.291
  other v3: 25.501,17.403 25.501,18.927
GND: C1.2 C2.2 C3.2 C4.2 C5.2 C6.2 C7.2 C8.2 C9.2 C10.1 C10.2 C11.1 C11.2 C12.1 C13.1 C14.2 C15.1 C16.2 C17.2 J1.5 J1.6 J1.7 J1.8 J1.9 J1.10 J1.11 J2.2 J3.01 J3.03 J3.05 J3.07 J3.09 J3.11 J3.13 J3.15 J3.17 J3.19 J3.21 J3.23 J3.25 J3.27 J3.29 J3.31 J3.33 J3.35 J3.36 J4.02 J4.04 J4.06 J4.08 J4.10 J4.12 J4.14 J4.16 J4.18 J4.20 J4.22 J4.24 J4.26 J4.28 J4.30 J4.32 J4.34 J4.35 J4.36 U1.1 U2.19 U2.57 U3.4 | length 64.7
  Top Layer w0.2: v1(0.635,8.128) J3.31@1.905,8.128 ; v1(0.635,10.668) J3.29@1.905,10.668 ; v1(0.762,3.048) J3.35@2.032,3.048 ; v1(0.762,5.588) J3.33@2.032,5.588 ; v1(0.762,13.208) J3.27@2.032,13.208 ; v1(0.762,15.748) J3.25@2.032,15.748 ; v1(0.762,18.288) J3.23@2.032,18.288 ; v1(0.762,20.828) J3.21@2.032,20.828 ; v1(0.762,23.368) J3.19@2.032,23.368 ; v1(0.762,25.908) J3.17@2.032,25.908 ; v1(0.762,28.448) J3.15@2.032,28.448 ; v1(0.762,30.988) J3.13@2.032,30.988 ; v1(0.762,33.528) J3.11@2.032,33.528 ; v1(0.762,36.068) J3.09@2.032,36.068 ; v1(0.762,38.608) J3.07@2.032,38.608 ; v1(0.762,41.148) J3.05@2.032,41.148 ; v1(0.889,43.815) 2.159,43.815 J3.03 ; v1(0.889,46.228) J3.01 ; v1(13.462,27.686) U3.4 ; J2.2 v1(15.24,47.498) ; v1(21.717,43.942) 22.108,43.942 J1.7 ; U2.19 22.219,14.472 v1@22.225,14.478 ; C16.2 22.237,3.925 v1@22.352,3.81 ; J1.6 28.956,44.704 v1(29.083,44.577) ; v1@33.274,44.069 v1(33.288,44.055) U1.1 ; J4.36 v1(47.625,3.683) ; J4.34 46.355,6.096 v1(47.625,6.096) ; J4.32@46.482,8.763 v1(47.752,8.763) ; J4.30@46.482,11.303 v1(47.752,11.303) ; J4.28@46.482,13.843 v1(47.752,13.843) ; J4.26@46.482,16.383 v1(47.752,16.383) ; J4.24@46.482,18.923 v1(47.752,18.923) ; J4.22@46.482,21.463 v1(47.752,21.463) ; J4.20@46.482,24.003 v1(47.752,24.003) ; J4.18@46.482,26.543 v1(47.752,26.543) ; J4.16@46.482,29.083 v1(47.752,29.083) ; J4.14@46.482,31.623 v1(47.752,31.623) ; J4.12@46.482,34.163 v1(47.752,34.163) ; J4.10@46.482,36.703 v1(47.752,36.703) ; J4.04@46.482,44.323 v1(47.752,44.323) ; J4.02@46.482,46.863 v1(47.752,46.863) ; J4.08@46.609,39.243 v1(47.879,39.243) ; J4.06@46.609,41.783 v1(47.879,41.783)
  Top Layer w0.75: v1(18.669,10.033) 19.05,9.652 C14.2
  Bottom Layer w0.2: C9.2 21.073,18.297 21.073,18.914 21.209,19.05 v1(22.225,19.05) ; v1(22.098,11.938) 22.107,11.947 22.597,11.947 C2.2 ; v1(22.098,16.002) C1.2 ; v1(22.733,17.145) 22.724,17.154 22.724,17.625 C8.2@22.733,17.634 ; v1(24.13,19.177) C5.2 ; C6.2@24.586,14.638 C6.2 24.756,14.487 24.756,15.485 v1(24.765,15.494) 24.756,15.503 24.756,16.12 C7.2 ; C4.2 24.835,17.691 24.835,17.075 v1(24.892,17.018) ; C3.2 28.899,11.125 28.899,10.979 v1(28.956,10.922) ; v1(31.506,19.304) C10.2
  other v1: 22.295,3.867 22.222,14.475 28.829,15.26 28.829,16.51 18.034,30.235 29.504,39.116 33.568,39.116 11.176,42.505 24.003,45.339 24.37,47.404 26.37,47.404
GPIO0: J3.04 U2.2 | length 32.4
  Top Layer w0.237: J3.04 10.668,37.846 10.668,35.712 10.922,35.458 10.922,24.496 16.047,19.37 U2.2@19.528,19.37
GPIO1: J3.06 U2.3 | length 30.6
  Top Layer w0.237: J3.06 4.826,41.075 10.475,35.426 10.475,24.463 15.968,18.97 U2.3
GPIO2: J3.08 U2.4 | length 28.3
  Top Layer w0.237: J3.08 9.144,34.29 9.144,25.315 15.888,18.57 U2.4@19.528,18.57
GPIO3: J3.10 U2.5 | length 26.5
  Top Layer w0.237: J3.10 8.805,32.089 8.805,25.174 15.809,18.17 U2.5
GPIO4: J3.12 U2.6 | length 24.4
  Top Layer w0.237: J3.12 7.874,30.48 7.874,25.626 15.73,17.77 U2.6
GPIO5: J3.14 U2.7 | length 22.3
  Top Layer w0.237: J3.14 4.826,30.682 5.134,30.373 5.134,30.299 6.604,28.829 6.604,26.314 15.548,17.37 U2.7
GPIO6: J3.16 U2.8 | length 20.3
  Top Layer w0.237: J3.16 4.944,28.33 4.944,27.314 15.288,16.97 U2.8
GPIO7: J3.18 U2.9 | length 18.9
  Top Layer w0.237: J3.18 14.164,16.57 U2.9
GPIO8: J3.20 U2.11 | length 18.1
  Top Layer w0.237: J3.20 12.424,15.77 U2.11
GPIO9: J3.22 U2.12 | length 17.3
  Top Layer w0.237: J3.22 10.284,15.37 U2.12
GPIO10: J3.24 U2.13 | length 16.4
  Top Layer w0.237: J3.24 8.144,14.97 U2.13
GPIO11: J3.26 U2.14 | length 15.5
  Top Layer w0.237: J3.26 6.004,14.57 U2.14
GPIO12: J3.28 U2.15 | length 16
  Top Layer w0.237: J3.28 19.507,13.208 20.066,13.767 U2.15
GPIO13: J3.30 U2.16 | length 17.7
  Top Layer w0.237: J3.30 6.731,12.573 20.251,12.573 20.989,13.311 20.989,13.737 U2.16
GPIO14: J3.32 U2.17 | length 19.3
  Top Layer w0.237: J3.32 8.636,11.938 20.193,11.938 21.389,13.134 21.389,13.737 U2.17
GPIO15: J3.34 U2.18 | length 20.8
  Top Layer w0.237: J3.34 10.541,11.303 20.136,11.303 21.819,12.986 U2.18
GPIO16: J4.27 U2.27 | length 19.6
  Top Layer w0.237: U2.27 25.419,13.058 25.777,12.7 42.375,12.7 43.518,13.843 J4.27
GPIO17: J4.25 U2.28 | length 19
  Top Layer w0.237: U2.28 41.072,13.767 J4.25
GPIO18: J4.23 U2.29 | length 19.2
  Top Layer w0.237: U2.29 26.88,14.57 27.227,14.224 38.989,14.224 J4.23
GPIO19: J4.21 U2.30 | length 19.7
  Top Layer w0.237: U2.30@26.91,14.941 27.059,14.941 27.268,14.732 36.957,14.732 J4.21
GPIO20: J4.19 U2.31 | length 21
  Top Layer w0.237: U2.31 27.943,15.37 28.321,15.748 28.717,15.748 28.725,15.756 29.034,15.756 29.042,15.748 36.068,15.748 43.507,23.187 43.507,23.822 J4.19
GPIO21: J4.17 U2.32 | length 21.5
  Top Layer w0.237: U2.32 26.652,15.8 27.33,15.8 29.437,17.907 35.052,17.907 J4.17
GPIO22: J4.15 U2.34 | length 22.2
  Top Layer w0.237: U2.34 27.621,16.57 40.133,29.083 J4.15
GPIO23: J4.13 U2.35 | length 23.1
  Top Layer w0.237: U2.35 26.628,16.975 27.546,16.975 42.194,31.623 J4.13
GPIO24: J4.11 U2.36 | length 24.4
  Top Layer w0.237: U2.36 27.462,17.37 35.594,25.502 35.594,26.069 J4.11
GPIO25: J4.09 U2.37 | length 26.5
  Top Layer w0.2: U2.37 27.409,17.77 35.273,25.635 35.273,27.272 43.688,35.687 J4.09
GPIO26: J4.07 U2.38 | length 28.6
  Top Layer w0.237: U2.38 26.652,18.2 27.385,18.2 34.544,25.359 34.544,28.956 43.688,38.1 J4.07
GPIO27: J4.05 U2.39 | length 30.7
  Top Layer w0.237: U2.39 26.652,18.6 27.306,18.6 33.782,25.076 33.782,31.877 J4.05
GPIO28: J4.03 U2.40 | length 32.5
  Top Layer w0.237: U2.40@26.91,19 27.227,19 33.443,25.217 33.443,32.818 43.688,43.063 J4.03
GPIO29: J4.01 U2.41 | length 34.9
  Top Layer w0.237: U2.41 27.117,19.37 32.987,25.24 32.987,33.749 42.418,43.18 42.418,45.593 J4.01
NetC16_1: C16.1 R3.1 Y1.1 | length 6.8
  Top Layer w0.5: v2(23.749,4.826) 23.749,4.888 24.964,6.103 Y1.1
  Bottom Layer w0.5: R3.1 21.987,6.86 23.749,5.098 v2(23.749,4.826)
NetR4_1: R4.1 U2.47 | length 8.7
  Top Layer w0.254: U2.47 24.219,24.532 24.765,25.078 R4.1
NetR5_1: R5.1 U2.46 | length 9
  Top Layer w0.254: U2.46 24.619,24.097 25.146,24.624 25.146,28.129 R5.1
QSPI_CLK: U2.52 U3.6 | length 9.4
  Top Layer w0.237: U3.6 21.888,28.785 22.603,28.785 22.742,28.646 22.742,24.69 22.219,24.167 U2.52
QSPI_SD0: U2.53 U3.5 | length 7.2
  Top Layer w0.237: U3.5 21.819,27.584 U2.53
QSPI_SD1: U2.55 U3.2 | length 13.1
  Top Layer w0.254: U3.2 15.748,30.226 v2(16.256,29.718) ; v2(16.256,27.94) 21.019,23.177 U2.55
  Bottom Layer w0.254: v2(16.256,27.94) v2(16.256,29.718)
QSPI_SD2: U2.54 U3.3 | length 13.5
  Top Layer w0.254: U3.3 18.415,28.956 21.419,25.952 U2.54
QSPI_SD3: U2.51 U3.7 | length 11
  Top Layer w0.237: U3.7 22.232,30.226 22.403,30.055 22.403,29.984 22.542,29.845 22.987,29.845 23.126,29.706 23.126,21.504 22.619,20.997 U2.51
QSPI_SS: R1.1 R2.2 U2.56 U3.1 | length 22.2
  Top Layer w0.254: U3.1@13.992,31.496 14.162,31.496 U3.1 15.949,31.496 16.33,31.115 v2(16.383,31.115) ; v4(16.764,26.416) 20.619,22.561 U2.56
  Top Layer w0.75: U3.1@14.162,31.496 12.954,32.704 R2.2 13.179,34.658 14.102,34.658 15.877,36.433 R1.1
  Bottom Layer w0.254: v2(16.383,31.115) 16.383,30.268 16.764,29.887 v4(16.764,26.416)
RUN: J4.29 U2.26 | length 20.2
  Top Layer w0.237: U2.26 25.019,12.979 25.679,12.319 42.672,12.319 J4.29
SWCLK: J4.33 U2.24 | length 23.1
  Top Layer w0.237: U2.24 24.219,12.82 25.609,11.43 30.099,11.43 33.105,8.424 34.756,8.424 36.957,6.223 J4.33
SWD: J4.31 U2.25 | length 21.3
  Top Layer w0.237: U2.25@24.649,13.479 24.649,12.869 25.58,11.938 30.226,11.938 33.401,8.763 J4.31
USB_BOOT: J2.1 R2.1 | length 8.7
  Top Layer w1: R2.1 13.079,36.433 15.24,38.594 J2.1
USB_D_N: J1.2 R5.2 | length 14.7
  Top Layer w0.237: J1.2 25.939,44.623 25.939,43.894 25.734,43.69 25.734,37.161 25.582,37.009 25.582,30.771 25.935,30.418 R5.2
USB_D_P: J1.3 R4.2 | length 14.6
  Top Layer w0.237: R4.2 24.865,30.418 25.218,30.771 25.218,37.16 25.37,37.312 25.37,43.841 25.385,43.855 25.385,44.689 J1.3
VBUS: C12.2 J1.1 U1.3 | length 8.1
  Top Layer w0.5: J1.1 26.67,43.053 27.178,42.545 27.178,41.826 27.354,41.651 28.088,41.651 U1.3@28.448,42.011
  Top Layer w0.75: v2(28.448,40.64) 28.448,42.011 U1.3@28.688,42.251
  Bottom Layer w0.75: C12.2 27.998,39.116 28.129,39.247 28.129,40.321 v2(28.448,40.64)
Xin: C14.1 U2.20 Y1.2 | length 9.1
  Top Layer w0.2: Y1.2@20.514,7.493 21.264,8.243 Y1.2 20.701,8.818 20.701,11.303 22.619,13.221 U2.20
  Top Layer w1: C14.1 Y1.2@20.514,7.493
Xout: R3.2 U2.21 | length 7.2
  Top Layer w0.25: v4(22.987,12.573) 23.003,12.589 23.003,13.751 U2.21
  Bottom Layer w0.25: v4(22.987,12.573) 23.987,11.573 R3.2
pads on no net: J1.4 U1.4

## Polygon pours and split planes (outlines as drawn)
GND on GND "GND_L02_P004" (solid, pour order 4): 48.006,51.181 2.413,51.054 ccw(c2.413,48.514) -0.127,48.514 -0.127,0.127 ccw(c2.159,0.127) 2.159,-2.159 45.847,-2.159 ccw(c45.847,0.127) 48.133,0.127 48.133,48.514
GND on GND "GND_L02_P000" (solid, pour order 0): 48.133,51.054 2.54,50.927 ccw(c2.54,48.387) 0,48.387 0,0 ccw(c2.286,0) 2.286,-2.286 45.974,-2.286 ccw(c45.974,0) 48.26,0 48.26,48.387
+3V3 on PWR "+3V3_L03_P005" (solid, pour order 5): 48.26,48.641 ccw(c45.847,48.641) 45.847,51.054 2.286,51.054 ccw(c2.286,48.641) -0.127,48.641 -0.127,-0.127 ccw(c2.032,-0.127) 2.032,-2.286 46.228,-2.286 ccw(c46.228,-0.254) 48.26,-0.254
GND on Top Layer "GND_L01_P007" (solid, pour order 7): 48.26,48.387 ccw(c45.72,48.387) 45.72,50.927 2.286,50.927 ccw(c2.286,48.641) 0,48.641 0,0 ccw(c2.286,0) 2.286,-2.286 45.974,-2.286 ccw(c45.974,0) 48.26,0
GND on Bottom Layer "GND_L04_P008" (solid, pour order 8): 48.26,48.387 ccw(c45.72,48.387) 45.72,50.927 2.286,50.927 ccw(c2.286,48.641) 0,48.641 0,0 ccw(c2.286,0) 2.286,-2.286 45.974,-2.286 ccw(c45.974,0) 48.26,0

## Silkscreen, mask and mechanical layers (free items; w line width, h text height)
Top Overlay:
  drawing of 34 lines, arcs and shapes, not listed
  text "GP29" at 39.692,46.49 h0.75
  text "3V3" at 6.223,45.855 h0.75
  text "GP28" at 39.692,43.696 h0.75
  text "GP0" at 6.223,43.338 h0.75
  text "GP27" at 39.693,41.41 h0.75
  text "GP1" at 6.223,40.82 h0.75
  text "GP26" at 39.693,38.997 h0.75
  text "GP2" at 6.223,38.303 h0.75
  text "GP25" at 39.689,36.33 h0.75
  text "GP3" at 6.223,35.785 h0.75
  text "GP24" at 39.695,33.917 h0.75
  text "GP4" at 6.223,33.267 h0.75
  text "GP23" at 39.693,31.25 h0.75
  text "GP5" at 6.223,30.75 h0.75
  text "GP22" at 39.698,28.837 h0.75
  text "GP6" at 6.223,28.232 h0.75
  text "GP21" at 39.786,26.297 h0.75
  text "GP7" at 6.223,25.715 h0.75
  text "GP20" at 39.694,23.63 h0.75
  text "GP8" at 6.223,23.197 h0.75
  text "GP19" at 39.692,20.836 h0.75
  text "GP9" at 6.223,20.679 h0.75
  text "GP18" at 39.692,18.296 h0.75
  text "GP10" at 6.223,18.162 h0.75
  text "GP11" at 6.223,15.644 h0.75
  text "GP17" at 39.693,15.629 h0.75
  text "GP16" at 39.693,13.216 h0.75
  text "GP12" at 6.223,13.127 h0.75
  text "RUN" at 39.997,10.93 h0.75
  text "GP13" at 6.223,10.609 h0.75
  text "SWD" at 39.843,8.517 h0.75
  text "GP14" at 6.223,8.091 h0.75
  text "SWCLK" at 38.989,5.977 h0.75
  text "GP15" at 6.223,5.574 h0.75
  text "GND" at 39.923,3.183 h0.75
  text "GND" at 6.223,3.056 h0.75
  text "Raspberry Pi  RP2040" at 1.524,-1.148 h2
  text "Ahmed Maher" at 29.845,-1.372 h2.5